# Altium PCB Dual_Holding_Dongle._2_sidedPcbDoc.PcbDoc
Units mil, origin at the board's own origin, x right, y up, seen from the top; angles counter-clockwise.
Board outline 828.35 x 1181.1 mil, 2 copper layers (Top Layer, Bottom Layer), stack 61.811 mil thick; 49 components, 39 nets, 196 pads, 131 vias.
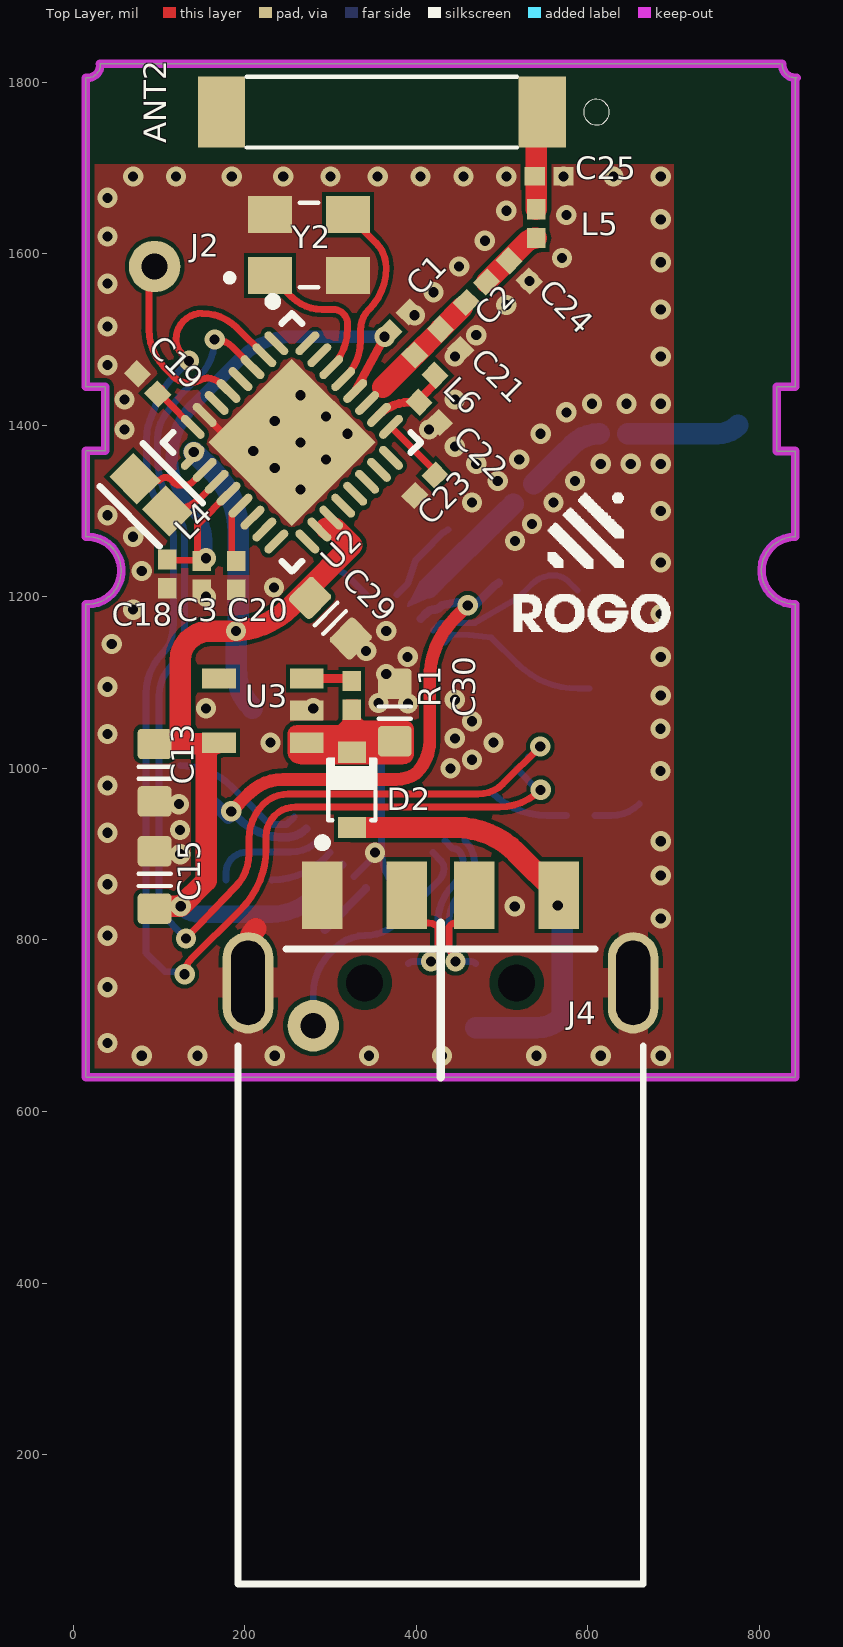
[diagram p0: Top Layer view]
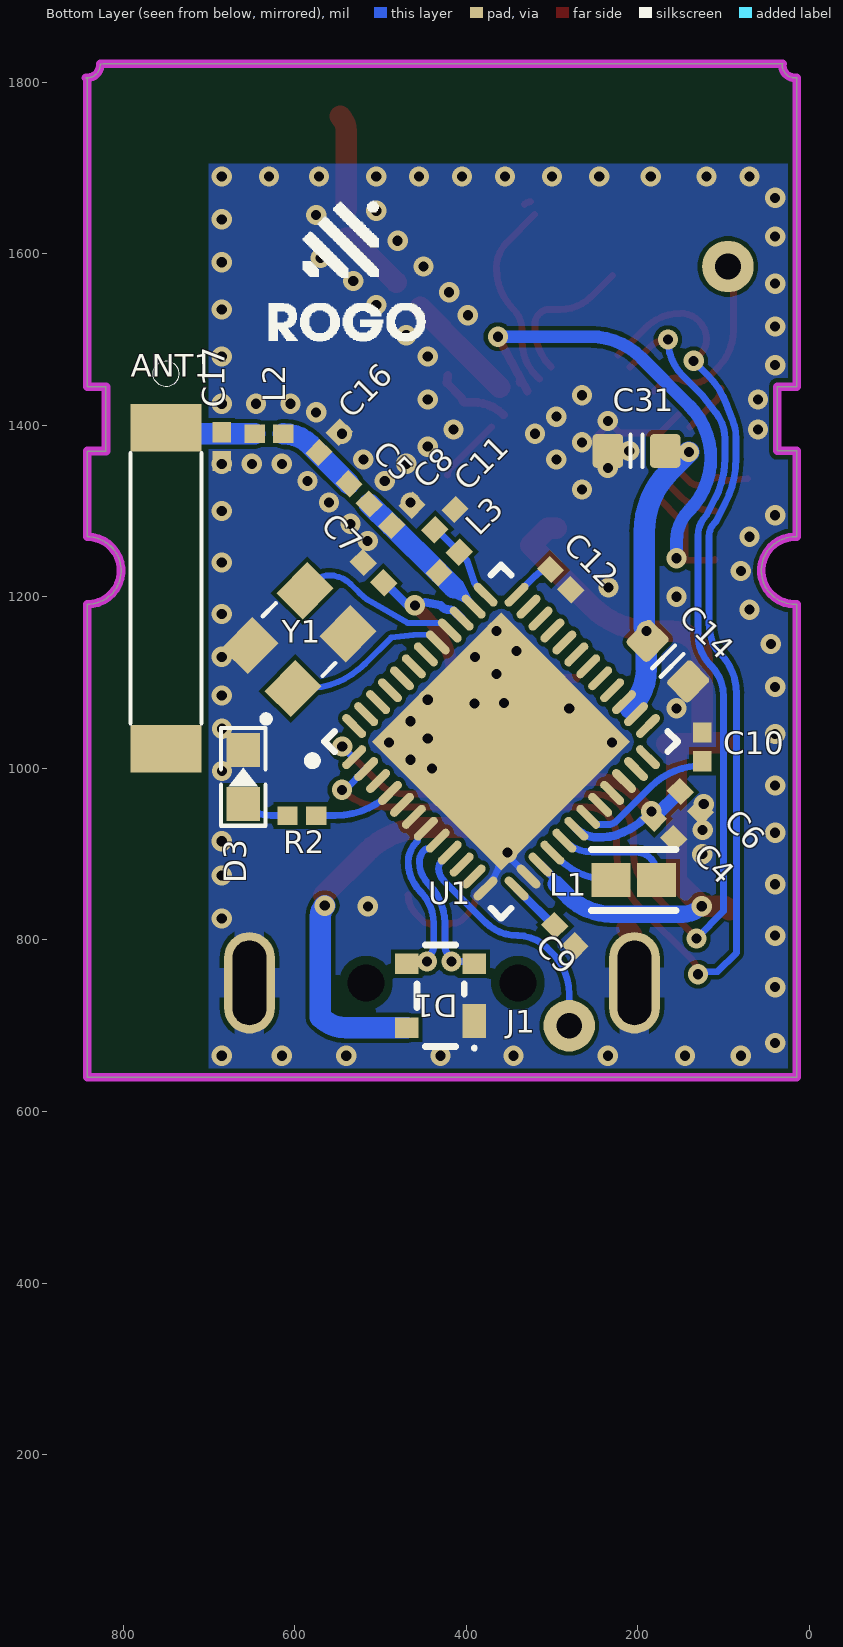
[diagram p1: Bottom Layer view, seen from below]
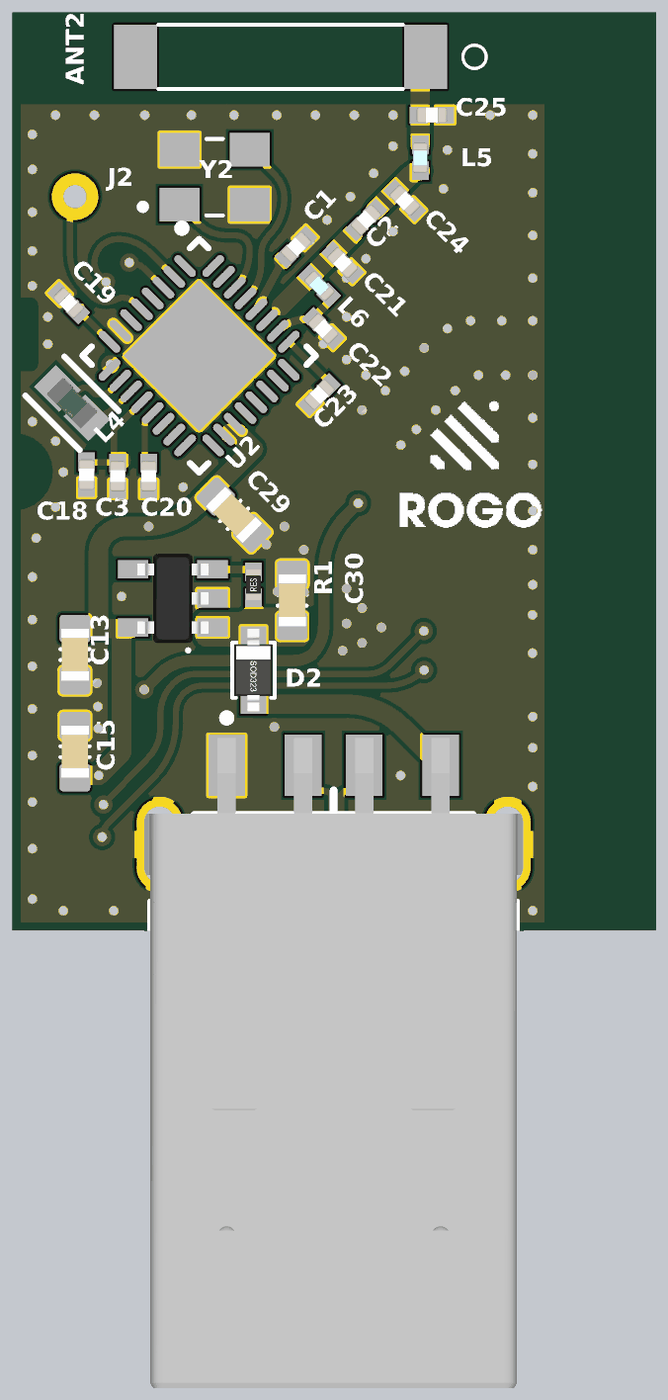
[diagram p2: 3D render of the assembled board from above, using the file's embedded part models]
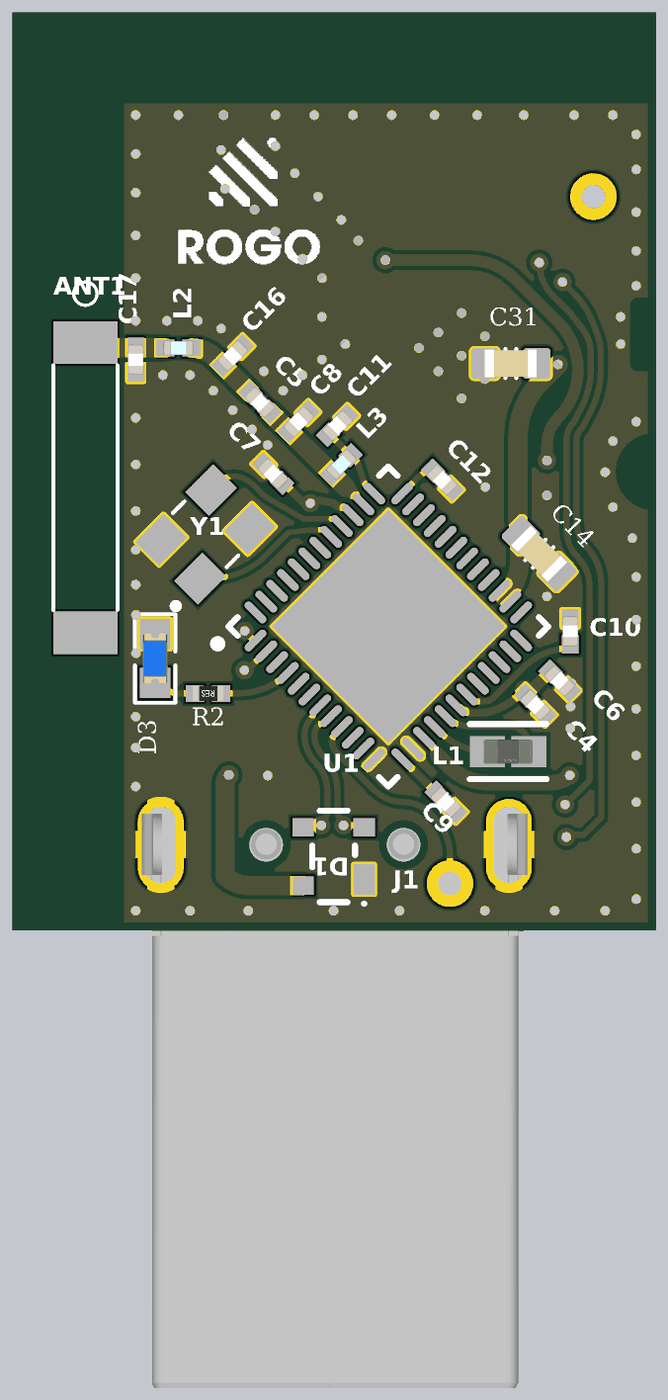
[diagram p3: 3D render of the assembled board from below, using the file's embedded part models]

## Layer stack, top to bottom
Top Solder: solder mask 0.5, Solder Resist, Dk 3.8
Top Layer: signal copper 1.378
Dielectric: core 59.055, FR-4, Dk 4.5
Bottom Layer: signal copper 1.378
Bottom Solder: solder mask 0.5, Solder Resist, Dk 3.8

## Board outline
15,640 15,1191.18 16.77,1191.18 ccw(c16.77,1230.55) 16.77,1269.92 15,1270 15,1370 37.5,1370 37.5,1445 15,1445 15,1805 16.77,1805 ccw(c16.77,1820) 31.74,1821.02 31.1,1821.1 823.9,1821.1 826.81,1821.02 ccw(c841.77,1820) 843.35,1805.08 841.77,1803.23 841.77,1444.92 820,1444.92 820,1369.92 841.77,1369.92 841.77,1269.92 ccw(c841.77,1230.55) 841.77,1191.18 841.77,640

## Design rules (kind name [scope] priority, off if disabled: settings)
BoardOutlineClearance [All] p1: gap=7.87 ignorepadtopadclearanceinfootprint=FALSE
Clearance [All] p1: gap=5 ignorepadtopadclearanceinfootprint=FALSE except(9.84: Arc-Hole Track-Hole SMDPad-Hole THPad-Hole Via-Hole Fill-Hole Poly-Hole Region-Hole Text-Hole)
ComponentClearance [All] p1: gap=5 collisioncheckmode=3 verticalgap=5 showdistances=TRUE
DiffPairsRouting [All] p1: maxlimit=10 minlimit=5 mostfreqgap=5 toplayer_minwidth=5 toplayer_maxwidth=1000 toplayer_prefwidth=5 bottomlayer_minwidth=5 bottomlayer_maxwidth=1000 bottomlayer_prefwidth=5 maxuncoupledlength=500
Height [All] p1: minheight=0 maxheight=71497.94 prefheight=500
HoleSize [All] p1: absolutevalues=TRUE maxlimit=248.03 minlimit=11.81 maxpercent=80.000 minpercent=20.000
HoleToHoleClearance [All] p1: gap=9.84 allowstackedmicrovias=FALSE
MinimumAnnularRing [All] p1: minimumring=3
MinimumSolderMaskSliver [All] p1: minsoldermaskwidth=0
PlaneClearance [All] p1: clearance=5
PlaneConnect PlaneConnectPowerPads [InPadClass('PowerPads')] p1: planeconnectstyle=Direct reliefexpansion=20 reliefentries=4 reliefconductorwidth=10 reliefairgap=10
PlaneConnect [All] p2: planeconnectstyle=Direct reliefexpansion=11.81 reliefentries=4 reliefconductorwidth=5 reliefairgap=5
PolygonConnect PolygonConnectPowerPads [All vs (InPadClass('PowerPads'))] p1: connectstyle=Direct reliefconductorwidth=10 reliefentries=4 polygonreliefangle="90 Angle" airgapwidth=10
PolygonConnect [All] p2: thpad.connectstyle=Relief thpad.reliefconductorwidth=35 thpad.reliefentries=4 thpad.polygonreliefangle="90 Angle" thpad.airgapwidth=5 smdpad.connectstyle=Direct smdpad.reliefconductorwidth=5 smdpad.reliefentries=4 smdpad.polygonreliefangle="90 Angle" smdpad.airgapwidth=5 via.connectstyle=Direct via.reliefconductorwidth=5 via.reliefentries=4 via.polygonreliefangle="90 Angle" via.airgapwidth=5
RoutingVias [All] p1: holewidth=11.81 width=23.62 viastyle="Through Hole" minholewidth=11.81 minwidth=23.62 maxholewidth=23.62 maxwidth=259.84
SilkToSilkClearance [All] p1: silktosilkclearance=0
SilkToSolderMaskClearance [IsPad] p1: minsilkscreentomaskgap=5 clearancetoexposedcopper=TRUE
SolderMaskExpansion [All] p1: expansion=2.95 istentingtop=FALSE
Width [All] p1: maxlimit=1000 minlimit=5 preferedwidth=5 minimp=50.000000 maximp=50.000000 favimp=50.000000
20 further rules are at their usual default settings.

## Classes and differential pairs
net class RF: NetANT1_1 NetANT2_1 NetC2_1 NetC2_2 NetC5_1 NetC5_2
differential pair D: +D_P -D_N

## Components (designator, comment, footprint, x,y, rotation, side; value= is the part's Value field where it differs from the comment)
ANT1 "ANT_Rainsun" ANT2-SMD-9.5X2.1X1.0MM 750,1210 r270 bottom
ANT2 "ANT_Rainsun" ANT2-SMD-9.5X2.1X1.0MM 360,1765 r180 top
C1 "2.2uF" CAP0402 380,1520 r45 top
C2 "220pF" CAP0402 470,1555 r45 top
C3 "104" CAP0402 150,1225 r270 top
C4 "2.2uF" CAP0402 170,930 r225 bottom
C5 "220pF" CAP0402 525,1320 r45 bottom
C6 "104" CAP0402 138.86,961.25 r225 bottom
C7 "2.2uF" CAP0402 508.17,1228.17 r45 bottom
C8 "2.7pF" CAP0402 475,1295 r135 bottom
C9 "1UF" CAP0402 285,805 r225 bottom
C10 "1UF" CAP0402 125,1025 r90 bottom
C11 "18pF" CAP0402 425,1290 r315 bottom
C12 "1UF" CAP0402 290,1220 r225 bottom
C13 "1UF" CAPC1608X90N 95,995 r270 top
C14 "1UF" CAPC1608X90N 165,1125 r225 bottom
C15 "1UF" CAPC1608X90N 95,870 r90 top
C16 "2pF" CAP0402 560,1380 r135 bottom
C17 "2pF" CAP0402 685,1375 r270 bottom
C18 "2.2uF" CAP0402 110,1226.73 r270 top
C19 "1UF" CAP0402 86.83,1448.17 r135 top
C20 "1UF" CAP0402 190,1225 r270 top
C21 "2.7pF" CAP0402 440,1500 r315 top
C22 "18pF" CAP0402 415,1415 r135 top
C23 "1UF" CAP0402 410,1330 r225 top
C24 "2pF" CAP0402 520,1580 r315 top
C25 "2pF" CAP0402 555,1690 r0 top
C29 "10uF" CAPC1608X90N 300,1175 r315 top
C30 "10uF" CAPC1608X90N 375,1065 r90 top
C31 "10uF" CAPC1608X90N 201.54,1370 r0 bottom
D1 "PRTR5V0U2X,215" NXP-SOT143B-4_V 430,735 r0 bottom
D2 "1N5819/SS14/S4(SOD_323)" SMT_DIODE_SOD_323 325,975 r90 top
D3 "BLUE" SMT_LED_0603 660,990 r90 bottom (schematic designator LED1)
J1 "TEST_POINT" TEST_POINT_HOLE 280,700 r180 bottom
J2 "TEST_POINT" TEST_POINT_HOLE 95,1585 r90 top
J4 "480-37-1000" MOLX-480-37-1000_V 428.39,801.18 r0 top locked
L1 "LBMF1608T470M" FP-LBMF1608-0_8-0_2-IPC_B 205,870 r180 bottom
L2 "3.3nH" IND0402 630,1390 r0 bottom value="150 mH"
L3 "1.3nF" IND0402 420,1240 r315 bottom value="150 mH"
L4 "LBMF1608T470M" FP-LBMF1608-0_8-0_2-IPC_B 91.2,1318.8 r315 top
L5 "3.3nH" IND0402 540,1635 r90 top value="150 mH"
L6 "1.3nF" IND0402 410,1470 r135 top value="150 mH"
R1 "Resistor" RES0402 325,1085 r90 top value=100K
R2 "Resistor" RES0402 591.73,945 r0 bottom value=100K
U1 "Telink TLSR8251F512ET48" QFN50P700X700X80_HS-49N 359.47,1031.23 r135 bottom locked
U2 "Telink TLSR8251F512ET32" QFN50P500X500X80_HS-33N2 255,1380 r315 top locked
U3 "AP2112K-3.3TRG1" SOT23-5 272.36,1067.4 r90 top
Y1 "ECS-240-10-33-AGM-TR" XTAL_ECS-240-10-33-AGM-TR 595,1150 r135 bottom
Y2 "ECS-240-10-33-AGM-TR" XTAL_ECS-240-10-33-AGM-TR 275,1610 r0 top

## Footprints (in the part's own frame and the unit in brackets; to place one, negate y for a bottom-side part, rotate by r counter-clockwise, add the part's x,y. Pads: shape width x height; smd on the part's side, far side on the other; paste and mask are expansions set on the pad)
ANT2-SMD-9.5X2.1X1.0MM [mm]
  rect 1.4x2.1 smd: 1(-4.75,0) 2(4.75,0)
  silkscreen extent -6.73,-1.05 4,1.05
CAP0402 [mm] "0402 foorprint SMT"
  rect 0.6x0.55 smd: 1(-0.425,0) 2(0.425,0)
  body extent -0.5,-0.26 0.5,0.26, height 0.57
CAPC1608X90N [mm] "Chip Capacitor, Body 1.6x0.8mm, EIA 0603, IPC Medium Density"
  round 0.254 on Mech15: 0(0,0)
  rrect25% 0.9x1 smd: 1(-0.85,0) 2(0.85,0)
  silkscreen extent -0.18,-0.48 0.18,0.48, body extent -0.85,-0.45 0.85,0.45, height 0.89
FP-LBMF1608-0_8-0_2-IPC_B [mil]
  rect 45.48x39.61 smd paste+0 mask+0: 1(-26.59,0) 2(26.59,0)
  silkscreen extent -49,-36 49,36, body extent -31,-16 31,16, height 39
IND0402 [mm] "0402 foorprint SMT"
  rect 0.6x0.55 smd: 1(-0.425,0) 2(0.425,0)
  body extent -0.5,-0.25 0.5,0.25, height 0.5
MOLX-480-37-1000_V [mm] "CONN, 4-Leads, Body 12x18.8mm"
  rect 1.2x2 smd: 1(-3.5,1.3) 2(-1,1.3) 3(1,1.3) 4(3.5,1.3)
  oval 1.5x3 hole 1 slot 2.5 at 90 deg: 5(-5.7,-1.3) 6(5.7,-1.3)
  round 0.5 hole 1.1 unplated: MH1(-2.25,-1.3) MH2(2.25,-1.3)
  silkscreen extent -6,-19.1 6,2.97, body extent -6.35,-19.08 6.35,2.2, height 3.07
NXP-SOT143B-4_V [mm] "SOT143, 4-Leads, Body 3x1.4mm"
  rect 0.7x1 smd: 1(-1,0.75)
  rect 0.7x0.6 smd: 2(-1,-0.95) 3(1,-0.95) 4(1,0.95)
  silkscreen extent -1.05,-1.5 0.7,1.6, body extent -0.7,-1.5 0.7,1.5, height 1.1
QFN50P500X500X80_HS-33N2 [mm] "QFN, 32-Leads, Body 5.00x5.00mm, Pitch 0.50mm, Thermal Pad 3.50x3.50mm, IPC Medium Density"
  oval 0.9x0.25 smd: 1(-2.4,1.75) 2(-2.4,1.25) 3(-2.4,0.75) 4(-2.4,0.25) 5(-2.4,-0.25) 6(-2.4,-0.75) 7(-2.4,-1.25) 8(-2.4,-1.75) 17(2.4,-1.75) 18(2.4,-1.25) 19(2.4,-0.75) 20(2.4,-0.25) 21(2.4,0.25) 22(2.4,0.75) 23(2.4,1.25) 24(2.4,1.75)
  oval 0.25x0.9 smd: 9(-1.75,-2.4) 10(-1.25,-2.4) 11(-0.75,-2.4) 12(-0.25,-2.4) 13(0.25,-2.4) 14(0.75,-2.4) 15(1.25,-2.4) 16(1.75,-2.4) 25(1.75,2.4) 26(1.25,2.4) 27(0.75,2.4) 28(0.25,2.4) 29(-0.25,2.4) 30(-0.75,2.4) 31(-1.25,2.4) 32(-1.75,2.4)
  rect 3.5x3.5 smd: 33(0,0)
  silkscreen extent -3.47,-2.7 2.7,2.7, body extent -2.55,-2.55 2.55,2.55, height 0.8
QFN50P700X700X80_HS-49N [mm] "QFN, 48-Leads, Body 7.00x7.00mm, Pitch 0.50mm, Thermal Pad 5.40x5.40mm, IPC Medium Density"
  oval 0.9x0.25 smd: 1(-3.4,2.75) 2(-3.4,2.25) 3(-3.4,1.75) 4(-3.4,1.25) 5(-3.4,0.75) 6(-3.4,0.25) 7(-3.4,-0.25) 8(-3.4,-0.75) 9(-3.4,-1.25) 10(-3.4,-1.75) 11(-3.4,-2.25) 12(-3.4,-2.75) 25(3.4,-2.75) 26(3.4,-2.25) 27(3.4,-1.75) 28(3.4,-1.25) 29(3.4,-0.75) 30(3.4,-0.25) 31(3.4,0.25) 32(3.4,0.75) 33(3.4,1.25) 34(3.4,1.75) 35(3.4,2.25) 36(3.4,2.75)
  oval 0.25x0.9 smd: 13(-2.75,-3.4) 14(-2.25,-3.4) 15(-1.75,-3.4) 16(-1.25,-3.4) 17(-0.75,-3.4) 18(-0.25,-3.4) 19(0.25,-3.4) 20(0.75,-3.4) 21(1.25,-3.4) 22(1.75,-3.4) 23(2.25,-3.4) 24(2.75,-3.4) 37(2.75,3.4) 38(2.25,3.4) 39(1.75,3.4) 40(1.25,3.4) 41(0.75,3.4) 42(0.25,3.4) 43(-0.25,3.4) 44(-0.75,3.4) 45(-1.25,3.4) 46(-1.75,3.4) 47(-2.25,3.4) 48(-2.75,3.4)
  rect 5.4x5.4 smd: 49(0,0)
  silkscreen extent -4.47,-3.7 3.7,3.7, body extent -3.55,-3.55 3.55,3.55, height 0.8
RES0402 [mm] "0402 foorprint SMT"
  rect 0.6x0.55 smd: 1(-0.425,0) 2(0.425,0)
  body extent -0.5,-0.25 0.5,0.25, height 0.3
SMT_DIODE_SOD_323 [mm]
  rect 0.63x0.83 smd: 1(-1.115,0) 2(1.115,0)
  silkscreen extent -0.9,-0.7 0.96,0.7, body extent -1.35,-0.62 1.35,0.62, height 1.1
SMT_LED_0603 [mm]
  rect 1x1 smd: 1(-0.8,0) 2(0.8,0)
  silkscreen extent -1.45,-0.66 1.45,0.66, body extent -0.81,-0.4 0.81,0.4, height 0.6
SOT23-5 [mm] "SOT143-4 as used in SP0503BAHTG"
  round 0.2 on Top Overlay: 1(-1.7,0.8)
  rect 0.6x1 smd: 1(-0.95,0) 2(0,0) 3(0.95,0) 4(0.95,2.6) 5(-0.95,2.6)
  body extent -1.46,0.13 1.46,2.47, height 1
TEST_POINT_HOLE [mil]
  round 60 hole 30: 1(0,0)
XTAL_ECS-240-10-33-AGM-TR [mm]
  rect 1.3x1.1 smd: 1(-1.15,-0.9) 2(1.15,-0.9) 3(1.15,0.9) 4(-1.15,0.9)
  silkscreen extent -2.45,-1.25 0.27,1.25

## Part data
ANT1 ANT2: "318010004", Package="FakePackage u", Availability="No availability data", Check_prices=https://www.snapeda.com/parts/AN9520/RainSun/view-part/106325/?ref=eda, MF=RainSun, MP=AN9520, Price=None, SnapEDA_Link=https://www.snapeda.com/parts/AN9520/RainSun/view-part/106325/?ref=snap
C1 C2 C3 C4 C5 C6 C7 C8 C9 C10 C11 C12 C13 C14 C15 C16 C17 C18 C19 C20 C21 C22 C23 C24 C25 C29 C30 C31: library part "CAP C_0603", "Capacitor SMD Cer 470nF 10% 16V X7R 0603", Manufacturer 1="Murata Electronics North America", Manufacturer 2="TDK Corporation", Manufacturer 3="Taiyo Yuden", Manufacturer 4=Samsung, Manufacturer Part Number 1=GRM188R71C474KA88D, Manufacturer Part Number 2=C1608X7R1C474K, Manufacturer Part Number 3=EMK107B7474KA-T, Manufacturer Part Number 4=CL10B474KONE, Package / Case="0603 (1608 metric)", Ratings="16V; X7R", Supplier Part Number 1=490-3295-2-ND, Tolerance=±10%, ComponentLink1Description=http://psearch.murata.com/capacitor/product/GRM188R71C474KA88#.pdf, ComponentLink1URL=http://psearch.murata.com/capacitor/product/GRM188R71C474KA88#.pdf, ComponentLink2Description=http://product.tdk.com/capacitor/mlcc/en/documents/mlcc_commercial_general_en.pdf, ComponentLink2URL=http://product.tdk.com/capacitor/mlcc/en/documents/mlcc_commercial_general_en.pdf, ComponentLink3Description=http://www.yuden.co.jp/or/product/category/capacitor/EMK107B7474KA-T.pdf, ComponentLink3URL=http://www.yuden.co.jp/or/product/category/capacitor/EMK107B7474KA-T.pdf, Material=ceramic, SCDType=spec, Supplier 1=Digi-Key, Supplier 2=Digi-Key, Supplier 3=Digi-Key, Supplier Part Number 2=445-5192-2-ND, Supplier Part Number 3=587-1250-2-ND
D1: library part CMP-2000-05285-1, "Ultra Low Capacitance Double Rail-to-Rail ESD Protection Diode, 5.5 V, 1 pF, -40 to 85 degC, 4-Pin SOT143B, RoHS, Tape and Reel", Capacitance Value=16pF, ESD Protection Voltage=8KV@ContactDisc, Leakage Current=0.1uA, Manufacturer="NXP Semiconductors", Operating Temp Range=-40Cto85C, Operating Temperature Classification=Industrial, Operating Temperature Max Deg. C=85C, Operating Temperature Min Deg. C=-40C, Package / Case=SOT, Reverse Breakdown Voltage=6V, Reverse Stand-off Voltage=5.5V, Configuration=Quad, Datasheet URL=https://datasheet.ciiva.com/4479/prtr5v0u2x-102853-4479461.pdf, Datasheet Version="Rev. 02, 01/2008", Direction Type=Uni-Directional, Leakage Current (Max)=0.1uA, Manufacturer URL=http://www.nxp.com/, Mounting=SurfaceMount, Mounting Style=SurfaceMount, Number of Elements=1, Package Type=SOT, Packaging=TapeandReel, Pin Count=3+Tab, Polarity=Uni-Directional, Product Depth (mm)=1.4mm, Product Height (mm)=1mm, Product Length (mm)=3mm, Rad Hardened=No, Suppressor Type=DiodeArrays, Working Voltage=5.5V, Working Voltage (Max)=5.5V
D2: library part SMT_DIODE_SCHOTTKY_SOD_323, "Surface mount schottky diode SOD-323(0805) Package"
D3: library part SMT_LED_0603, "SMT LED"
J4: library part CMP-1676-00005-1, "Universal Serial Bus (USB) Shielded I/O Plug, Type A, Right Angle Connector, 1.5 A, -20 to 85 degC, 4-Pin SMD, RoHS, Tray", Case Code (Imperial)=0603, Case Code (Metric)=1608, Max Operating Temperature="155 degC", Min Operating Temperature="-55 degC", Package Quantity=5000, Power Rating="100 mW", Resistance="1 mohm", Tolerance=1%, Voltage Rating="50 V", Case\Package=0603, ComponentLink1Description="Manufacturer URL", ComponentLink1URL=http://www.molex.com/, ComponentLink2Description=Datasheet, ComponentLink2URL=http://www.molex.com/pdm_docs/sd/480371000_sd.pdf, DatasheetVersion="Rev. D, 06/2004", Height="0.45 mm", Length="1.6 mm", Mount="Surface Mount", PackageDescription="4-Pin Surface Mount Device, Body 12 x 18.8 mm", PackageReference=480-37-1000, Packaging="Tape and Reel", Pins=2, REACH SVHC="No SVHC", RoHSCompliant=true, Voltage Rating (DC)="50 V", Width="0.8 mm"
L1 L4: library part CMP-14484-001230-1, "SMD Inductors 47uH ±20% 0.035A 3.25Ω 0603", Case/Package=0603, DC Current=35mA, DC Resistance (DCR)=3.25R, Inductance=47uH, Max Operating Temperature=105°C, Min Operating Temperature=-40°C, Self Resonant Frequency=11MHz, Test Frequency=2.52MHz, Tolerance=20%, Core Material=Ferrite, Depth=0.9mm, Halogen Free="Halogen Free", Lead Free="Lead Free", Length=1.7mm, Military Standard=Not, Packaging="Tape and Reel", Radiation Hardening=No, RoHS Compliant=Yes
L2 L3 L5 L6: library part Inductor, "Inductor"
R1 R2: library part RES-SM-0603-10K, "RES SM 0603 10K", Supplier Part Number 1=9330399, Supplier 1=Farnell, Supplier 2=Digi-Key, Supplier Part Number 2=541-10.0KHCT-ND
U3: "Linear Voltage Regulator IC 1 Output 600mA SOT-25", Package="SOT-753 Diodes Inc.", Digi-Key_Part_Number=AP2112K-3.3TRG1DICT-ND, Digi-Key_Purchase_URL=https://www.digikey.com.au/product-detail/en/diodes-incorporated/AP2112K-3.3TRG1/AP2112K-3.3TRG1DICT-ND/4505257?utm_source=snapeda&utm_medium=aggregator&utm_campaign=symbol, MF="Diodes Inc.", MP=AP2112K-3.3TRG1, SnapEDA_Link=https://www.snapeda.com/parts/AP2112K-3.3TRG1/Diodes%20Inc./view-part/454988/?ref=snap
Y1 Y2: Package=None, Availability=Unavailable, MP=ECS-240-10-33-AGM-TR, Price=None

## Via types
v1: diameter 23.62, hole 11.81, Top Layer to Bottom Layer, tented both sides, 131 vias

## Nets (pads, with @x,y where several pads share a name; then routed paths per layer and width w, separated by ;. In a path a pad name is that pad's centre, name@x,y a point inside that pad or via, vN(x,y) a via of type N, cw(c..) or ccw(c..) an arc to the next point about the centre after c; other vN are vias at no path point)
1.2V: C4.1 C6.1 C7.1 U1.18 U1.39 | length 681.3
  Top Layer w15: v1(184.31,949.87) 205.11,970.66 cw(c245,930.77) 245,987.19 376.57,987.19 ccw(c376.57,1029.06) 399.91,994.3 ccw(c361.77,1032.44) 415.71,1032.44 415.71,1104.29 cw(c515.71,1104.29) 444.99,1174.99 v1(460,1190)
  Bottom Layer w10: v1(184.31,949.87) 191.35,942.83 ccw(c247.51,999) 216.55,925.85 224.01,922.69 ccw(c234.89,948.41) 232.42,920.6 240.48,919.88 ccw(c247.51,999) 247.51,919.57 ccw(c247.51,953.88) 248.11,919.57 cw(c248.25,909.57) 248.46,919.57 ccw(c248.81,934.49) 248.81,919.57 ccw(c248.81,934.49) 251.14,919.75 cw(c252.67,909.87) 251.49,919.8 ccw(c247.51,953.88) 256.07,920.65 ccw(c247.51,953.88) U1.18 ; U1.39 412.84,1182.03 cw(c420,1174.87) 420,1185 ccw(c420,1197.07) 428.54,1188.54 430,1190 447.93,1193.79 ; v1(460,1190) 468.28,1190 490.66,1212.38 C7.1
  Bottom Layer w15: C6.1 150.7,973.02 C4.1@179.08,944.64 ; C4.1@180.82,942.67 C4.1@182.53,944.38
1.2V_B: C1.1 C3.1 C18.1 U2.12 U2.28 | length 672.7
  Top Layer w8: C18.1 110.87,1242.6 145.87,1242.6 147.5,1244.23 C3.1 ; v1(155,1245) 151.73,1241.73 C3.1 ; U2.12 145,1283.92 145,1245.9 147.09,1243.82 149.17,1241.73 C3.1 ; U2.28@337.82,1448.9 U2.28@338.41,1450.79
  Top Layer w10: U2.28 v1(363.17,1503.17) C1.1@363.17,1496.79
  Bottom Layer w15: 140.46,1300.39 cw(c105.24,1265.24) 155,1265.24 v1(155,1245) ; 140.43,1300.43 cw(c201.81,1361.81) 115,1361.81 cw(c201.71,1361.81) 140.4,1423.12 195.95,1478.68 cw(c255.08,1419.55) 255.08,1503.17 v1(363.17,1503.17)
3.3V: C13.1 C14.1 C15.1 C29.1 C31.1 U1.15 U1.26 U1.27 U2.9 U2.18 U2.19 U3.5 | length 1230.4
  Top Layer w25: C15.1@93.46,835 C15.1 cw(c101.8,829.74) 101.8,839.35 v1(125.55,839.35) 155,868.8 U3.5@155,1028.46 ; C13.1@96.54,1030 125,1030 125,1126.72 cw(c157.07,1126.72) 134.39,1149.39 cw(c160,1123.79) 160,1160 183.58,1160 ccw(c183.58,1260) 254.29,1189.29 270,1205 325,1260 305,1280 300.93,1280 295,1280 ; 125,1028.46 U3.5@155,1028.46 ; U3.5@166.29,1028.46 U3.5@155,1028.46
  Bottom Layer w10: 295.63,865.28 cw(c306.9,865.28) 298.92,873.25 U1.15
  Bottom Layer w20: v1(125.55,839.35) ccw(c148.13,861.92) 148.13,830 230.37,830 ccw(c230.37,902.38) 257.88,835.43 260.04,836.32 ccw(c254.33,850.19) 261.14,836.83 263.22,837.89 ccw(c230.37,902.38) 281.55,851.2 295.63,865.28
  Bottom Layer w25: v1(140.62,1368.8) 163.21,1346.21 cw(c92.5,1275.5) 192.5,1275.5 192.5,1166.04 cw(c183.96,1166.04) v1(190,1160) 190,1116.41 ccw(c255.34,1116.41) 209.09,1070.25 ccw(c255.34,1116.41) 209.14,1070.2
D_N: D1.3 J4.3 U1.7 | length 288.7
  Top Layer w8: v1(445.81,775) ccw(c435.61,775) 442.82,782.22 cw(c454.46,793.86) 438,793.86 438,815 440.76,817.76 cw(c445.41,813.11) 445.41,819.69 ccw(c445.41,826.26) 450.06,821.61 458.53,830.08 ccw(c436.24,852.36) J4.3
  Bottom Layer w8: U1.7 454.89,921.89 cw(c450.86,917.85) 456.56,917.85 ccw(c462.27,917.85) 458.23,913.82 458.28,913.77 cw(c435.52,891.01) 467.7,891.01 467.7,890.88 cw(c418.37,890.88) 453.26,856 ccw(c490.09,819.17) 438,819.17 438,792.56 ccw(c451.33,792.56) 441.9,783.14 442.82,782.22 cw(c435.61,775) v1(445.81,775) 463.1,775 cw(c463.1,766.13) D1.3
D_P: D1.2 J4.2 U1.8 | length 287.1
  Top Layer w8: J4.2 ccw(c420.53,852.36) 398.25,830.08 404.51,823.81 ccw(c414.48,833.78) 414.48,819.69 cw(c414.48,805.59) 424.44,815.56 425,815 425,793.86 cw(c408.54,793.86) 420.18,782.22 ccw(c427.39,775) v1(417.19,775)
  Bottom Layer w8: D1.2 cw(c396.9,766.13) 396.9,775 v1(417.19,775) cw(c427.39,775) 420.18,782.22 421.09,783.13 ccw(c411.67,792.56) 425,792.56 425,819.3 cw(c489.76,819.3) 443.97,865.1 444.02,865.14 ccw(c418.21,890.95) 454.7,890.95 ccw(c435.36,890.95) 449.04,904.62 ccw(c445.01,900.59) 445.01,906.3 cw(c445.01,912) 440.97,907.96 U1.8
GND: C1.2 C3.2 C4.2 C6.2 C7.2 C8.2 C9.2 C10.2 C11.1 C12.2 C13.2 C14.2 C15.2 C16.2 C17.2 C18.2 C19.2 C20.2 C21.2 C22.1 C23.2 C24.2 C25.2 C29.2 C30.2 C31.2 D1.1 D3.2 J4.1 J4.5 J4.6 U1.12 U1.14 U1.49 U2.7 U2.33 U3.2 Y1.2 Y1.4 Y2.2 Y2.4 | length 405
  Top Layer w8: U2.7 174.31,1391.09 221.09,1391.09 U2.33@232.5,1402.5 ; v1(235,1405) 235,1400 U2.33
  Top Layer w25: J4.5 203.98,791.41 cw(c234.75,791.41) 212.99,813.17
  Bottom Layer w8: U1.14 349.53,896.02 ccw(c343.76,901.79) v1(351.92,901.79) ; U1.49 359.47,903.7 ccw(c421.25,903.7) U1.12
  other v1: 80,665 145,665 235,665 345,665 430,665 540,665 615,665 685,665 40,680 40,745 40,805 685,825 514.77,839.16 40,865 685,875 124.95,900.01 685,915 40,925 124.51,928.05 123.29,958.29 40,980 684.68,996.81 440,1000 465,1010 230,1030 490,1030 445,1035 40,1040 684.68,1046.18 465,1055 155,1070 280,1070 356.07,1076.3 390.26,1075.56 445,1080 685,1085 40,1095 365,1110 390,1130 685,1130 341.62,1136.91 45,1145 365,1160 685,1180 70,1185 155,1200 234.31,1210.76 80,1230 685,1240 515,1265 70,1270 535,1285 40,1295 685,1300 465,1310 560,1310 265,1325 495,1335 585,1335 235,1350 470,1355 615,1355 650,1355 685,1355 295,1360 520,1360 210,1370 445,1375 265,1380 320,1390 545,1390 60,1395 415,1395 295,1410 575,1415 605,1425 645,1425 685,1425 60,1430 445,1430 265,1435 40,1470 445,1480 685,1480 470,1505 40,1515 398.17,1528.25 685,1535 505,1540 420,1555 40,1565 531.83,1568.17 450,1585 685,1590 570,1595 480,1615 40,1620 685,1640 575,1645 505,1650 40,1665 70,1690 120,1690 185,1690 245,1690 300,1690 355,1690 405,1690 455,1690 505,1690 571.73,1690 630,1690 685,1690
LED_PIN: R2.1 U1.4 | length 93.1
  Bottom Layer w8: U1.4 ccw(c552.59,1035.05) 552.59,945 R2.1
NetANT1_1: ANT1.1 C17.1 L2.2 | length 130.9
  Bottom Layer w24.88: L2.2 750.86,1390 ccw(c750.86,1424.14) ANT1.1@775,1400
NetANT2_1: ANT2.1 C25.1 L5.2 | length 110.1
  Top Layer w24.88: L5.2 540,1690 540,1743.08 cw(c563.93,1743.08) ANT2.1@547.01,1760
NetC2_1: C2.1 C21.1 L6.2 U2.27 | length 127.4
  Top Layer w24.88: 360.88,1444.12 398.38,1481.62 C21.1@425.35,1508.59 ; C21.1 C2.1@453.75,1537.41
NetC2_2: C2.2 C24.1 L5.1 | length 78.8
  Top Layer w24.88: C2.2 528.51,1613.51 cw(c540,1602.01) L5.1
NetC5_1: C5.1 C8.1 L3.2 U1.38 | length 138.8
  Bottom Layer w24.88: 414.33,1210.67 L3.2 487.28,1282.71 C5.1
NetC5_2: C5.2 C16.1 L2.1 | length 98.6
  Bottom Layer w24.88: C5.2 570,1365 582.08,1377.08 cw(c613.27,1345.9) L2.1
NetC9_1: C9.1 U1.13 | length 68.1
  Bottom Layer w10: C9.1@293.23,811.87 U1.13
NetC10_1: C10.1 U1.19 | length 160.8
  Bottom Layer w8: C10.1@125,1003.27 cw(c125,917.95) 139.87,1001.96 cw(c125,917.95) 185.2,978.41 cw(c125,917.95) 185.33,978.28 197.13,966.48 ccw(c207.05,976.25) 197.21,966.4 225.05,938.56 ccw(c234.89,948.41) 234.89,934.49 248.81,934.49 U1.19
NetC11_2: C11.2 L3.1 U1.37 | length 98.8
  Bottom Layer w8: C11.2 430.84,1274.5 L3.1 399.51,1243.17 390.6,1216.77 cw(c383.02,1219.33) 388.68,1213.68 U1.37@377.56,1202.56 ; U1.37@377.56,1202.56 ccw(c422.93,1202.44) U1.37 U1.37@377.56,1202.56
NetC19_1: C19.1 U2.8 | length 59.2
  Top Layer w8: C19.1@103.17,1443.17 ccw(c124.35,1443.17) 109.37,1428.19 U2.8
NetC20_1: C20.1 U2.13 | length 67.7
  Top Layer w8: C20.1@185,1242.72 185,1295.58 195.15,1305.73 U2.13
NetC22_2: C22.2 L6.1 U2.26 | length 89.4
  Top Layer w10: U2.26 cw(c392.38,1376.24) 368.12,1420.63 cw(c372.88,1411.84) 369.36,1421.2 ccw(c360.88,1444.12) 372.91,1422.85 cw(c377.79,1414.12) 374.06,1423.4 ; 374.1,1423.41 cw(c392.38,1376.24) 392.38,1426.83 C22.2 405.77,1432.47 422.53,1449.23 L6.1
NetC30_1: C30.1 D2.2 R1.1 U3.1@272.36,1030 | length 57.2
  Top Layer w25: U3.1@272.36,1030 283.46,1018.9 D2.2
NetJ1_1: J1.1 U1.9 | length 286.1
  Bottom Layer w8: J1.1 280,736.72 cw(c348.28,736.72) 300,785 305.86,790.86 cw(c340,756.72) 340,805 ccw(c340,858.17) 377.6,820.57 426.47,869.44 ccw(c412.53,883.38) 432.24,883.38 ccw(c419.02,883.38) 428.37,892.73 U1.9
NetJ2_1: J2.1 U2.5 | length 213.5
  Top Layer w8: J2.1 ccw(c95,1578.42) 88.42,1578.42 88.42,1511.64 ccw(c151.71,1511.64) 105.4,1468.51 ccw(c151.71,1511.64) 106.96,1466.89 116.43,1457.08 ccw(c135,1475) 144.11,1450.85 153.6,1454.43 cw(c156.43,1446.95) 157.08,1454.92 cw(c155,1428.25) 173.92,1447.16 U2.5
NetL1_1: L1.1 U1.16 | length 77.4
  Bottom Layer w8: L1.1 ccw(c231.59,957.5) U1.16@293.45,895.61 ; U1.16@293.47,895.63 U1.16
NetL1_2: L1.2 U1.17 | length 133
  Bottom Layer w8: L1.2 178.41,879.08 cw(c200.92,879.08) 185,895 cw(c202.81,877.19) 202.81,902.38 253.54,902.38 ccw(c253.54,947.85) U1.17
NetL4_1: L4.1 | length 91.9
  Top Layer w8: L4.1 96.82,1335.53 98.07,1335.31 ccw(c97.18,1343.26) 102.21,1337.04 cw(c107.93,1330.09) 114.3,1336.44 118.4,1332.34 ccw(c124.05,1338) 124.05,1330 130,1330 ccw(c130,1343.04) 139.22,1333.82 153.39,1347.99
NetL4_2: L4.2 | length 69
  Top Layer w8: L4.2 ccw(c110,1356.11) 149.68,1316.43 167.31,1334.07
NetL7_1: U2.10
NetL7_2: U2.11
NetLED1_1: D3.1 R2.2 | length 55.1
  Bottom Layer w8: R2.2 627.4,945 ccw(c627.4,991.11) D3.1
NetR1_2: R1.2 U3.3 | length 53.5
  Top Layer w10: U3.3 317.59,1104.8 cw(c317.59,1094.32) R1.2
RST_A: C12.1 U1.36 | length 50.7
  Bottom Layer w8: C12.1 cw(c301.83,1207.34) 319.15,1224.66 U1.36
RST_B: C23.1 U2.25 | length 77
  Top Layer w8: U2.25 418.32,1350.3 cw(c409.85,1341.83) C23.1
RXD: U1.2 U2.2 | length 1522.3
  Top Layer w8: v1(130,760) cw(c154.14,760) 137.07,777.07 195.71,835.71 ccw(c125,906.42) 225,906.42 225,920.86 cw(c259.14,920.86) 235,945 cw(c259.14,920.86) 259.14,955 496.72,955 ccw(c496.72,1023.28) v1(545,975) ; v1(135,1475) 127.19,1482.81 cw(c144.56,1500.17) 121.26,1492.42 cw(c144.56,1500.17) 120,1500.17 cw(c150.25,1500.17) 150.25,1530.43 cw(c150.25,1472.68) 164.85,1528.55 cw(c150.25,1472.68) 191.06,1513.53 ; 191.09,1513.51 U2.2
  Bottom Layer w8: v1(130,760) 127.01,762.99 107.01,762.99 85,785 85,1086.72 cw(c153.28,1086.72) 105,1135 ccw(c76.03,1163.97) 112.35,1145.01 ccw(c105.24,1148.68) 112.75,1145.93 ccw(c44.64,1170.36) 117,1170.36 117,1270.86 ccw(c95.86,1270.86) 110.82,1285.8 cw(c120,1295) 108.41,1289.11 98.39,1308.59 cw(c201.81,1361.81) 85.5,1361.81 85.5,1384.22 cw(c147.8,1384.14) 89.78,1406.83 96.83,1424.89 cw(c190,1388.58) 119.29,1459.29 v1(135,1475) ; U1.2 517.26,999.21 541.47,975 v1(545,975)
TXD: U1.1 U2.3 | length 1358.8
  Top Layer w8: v1(131.66,801.81) 189.02,861.63 ccw(c150.43,900.21) 205,900.21 205,918.03 cw(c261.58,918.03) 221.57,958.04 ; v1(165,1500) cw(c165,1471.61) 185.07,1491.69 U2.3 ; 221.6,958.07 cw(c250.44,929.17) 239.85,968.6 cw(c250.44,929.17) 250.44,970 472.07,970 ccw(c472.07,1011.26) 501.24,982.08 v1(544.58,1025.42)
  Bottom Layer w8: 109.02,1414.59 ccw(c147.8,1384.14) 98.5,1384.22 98.5,1361.81 ccw(c201.81,1361.81) 109.94,1314.55 120,1295 cw(c95.86,1270.86) 130,1270.86 130,1156.21 cw(c78.79,1156.21) 130,1155.95 cw(c78.79,1156.21) 115,1120 ccw(c150.6,1084.4) 100.26,1085.17 ccw(c150.6,1084.4) 100.25,1084.4 100.25,1080.04 100,1058.12 100,1058.03 100,833.47 v1(131.66,801.81) ; 109.03,1414.6 125,1435 147.32,1457.32 ccw(c104.64,1500) v1(165,1500) ; U1.1 530.88,1012.93 532.09,1012.93 v1(544.58,1025.42)
VBUS: D1.4 D2.1 J4.4 | length 504.8
  Top Layer w25: D2.1 446.02,931.1 cw(c446.02,831.1) 516.73,901.81 J4.4
  Bottom Layer w25: D1.4 540.06,697.6 ccw(c540.06,739.94) 570,710 570,827.93 ccw(c552.93,827.93) v1(565,840)
XC1_A: U1.40 Y1.3 | length 195.9
  Bottom Layer w7: U1.40 428.37,1169.73 451.59,1169.69 468.41,1169.69 515.54,1196.83 ccw(c464.64,1265.36) 525,1205 534.39,1214.39 cw(c560,1188.79) 560,1225 cw(c560,1200.59) 577.26,1217.85 Y1.3
XC1_B: U2.29 Y2.3 | length 230.1
  Top Layer w8: U2.29 318.02,1456.94 ccw(c277.04,1497.93) 335,1497.93 335,1510.86 cw(c369.14,1510.86) 345,1535 ccw(c296.72,1583.28) 365,1583.28 ccw(c322.93,1583.28) 352.68,1613.03 Y2.3 ; Y2.3@325.28,1660.43 cw(c325.28,1650.93) 332,1657.65 Y2.3@332.24,1657.4
XC2_A: U1.41 Y1.1 | length 193
  Bottom Layer w7: U1.41 442.29,1155.81 461.77,1155.31 487.56,1152.44 487.6,1152.4 517.78,1122.22 ccw(c588.49,1192.93) 588.49,1092.93 Y1.1
XC2_B: U2.30 Y2.1 | length 169.7
  Top Layer w8: Y2.1 254.65,1549.64 ccw(c290,1585) 290,1535 302.93,1535 cw(c302.93,1517.93) 315,1530 cw(c302.93,1517.93) 320,1517.93 320,1512.93 cw(c256.82,1512.93) 301.49,1468.25 U2.30
pads on no net: ANT1.2 ANT2.2 C13.0 C14.0 C15.0 C29.0 C30.0 C31.0 J4.MH1 J4.MH2 U1.3 U1.5 U1.6 U1.10 U1.11 U1.20 U1.21 U1.22 U1.23 U1.24 U1.25 U1.28 U1.29 U1.30 U1.31 U1.32 U1.33 U1.34 U1.35 U1.42 U1.43 U1.44 U1.45 U1.46 U1.47 U1.48 U2.1 U2.4 U2.6 U2.14 U2.15 U2.16 U2.17 U2.20 U2.21 U2.22 U2.23 U2.24 U2.31 U2.32 U3.1@240.87,1000.47 U3.4

## Polygon pours and split planes (outlines as drawn)
GND on Top Layer "GND_L01_P000" (solid, remove dead copper, pour order 0): 15.84,1703.95 700,1703.95 700,638.95 15.84,638.95
GND on Bottom Layer "GND_L02_P001" (solid, remove dead copper, pour order 1): 15,1705 700,1705 700,647.5 15,647.5

## Keep-outs
Keep-Out Layer:
  lines w10: 15,1191.18 15,640 841.77,640 841.77,1191.18 cw(c841.77,1230.55) 841.77,1269.92 841.77,1369.92 820,1369.92 820,1444.92 841.77,1444.92 841.77,1803.23 ; 15,1270 15,1370 37.5,1370 37.5,1445 15,1445 15,1465 15,1805 ; 16.77,1191.18 ccw(c16.77,1230.55) 16.77,1269.92 ; 16.77,1805 ccw(c16.77,1820) 31.73,1821.02 ; 31.1,1821.1 823.9,1821.1 ; 826.81,1821.02 ccw(c841.77,1820) 843.35,1805.08

## Other copper
Top Layer:
  region net NetC30_1: 320,1080 330,1080 cw(c330,1075) 335,1075 335,1061.24 ccw(c340.83,1061.24) 340.83,1055.41 387.51,1055.41 cw(c387.51,1045.69) 397.24,1045.69 397.24,1017.24 cw(c385,1017.24) 385,1005 265,1005 cw(c265,1020) 250,1020 250,1040 cw(c260,1040) 260,1050 305,1050 ccw(c305,1060) 315,1060 315,1075 cw(c320,1075)
Bottom Layer:
  region net NetC5_1: 389.33,1188.17 cw(c401.4,1188.17) 392.87,1196.7 394.33,1198.17 404.33,1218.17 424.33,1203.17 391.48,1188.52

## Silkscreen, mask and mechanical layers (free items; w line width, h text height)
Top Overlay:
  drawing of 10 lines, arcs and shapes, not listed
Bottom Overlay:
  drawing of 9 lines, arcs and shapes, not listed

## Text inside footprints (layer, text, board x,y; h text height)
J4: Mechanical 1 "PCB EDGE" at 478.39,650 h19.68